# Altium PCB Jumper.PcbDoc (part 2 of 2)
Units mil, origin at the board's own origin, x right, y up, seen from the top; angles counter-clockwise.
Board outline 6325 x 3228 mil, 4 copper layers (Top Layer, GND, POWER, Bottom Layer), stack 61.145 mil thick; 115 components, 129 nets, 531 pads, 416 vias.
Unrouted connection lines stored in the file: 52.
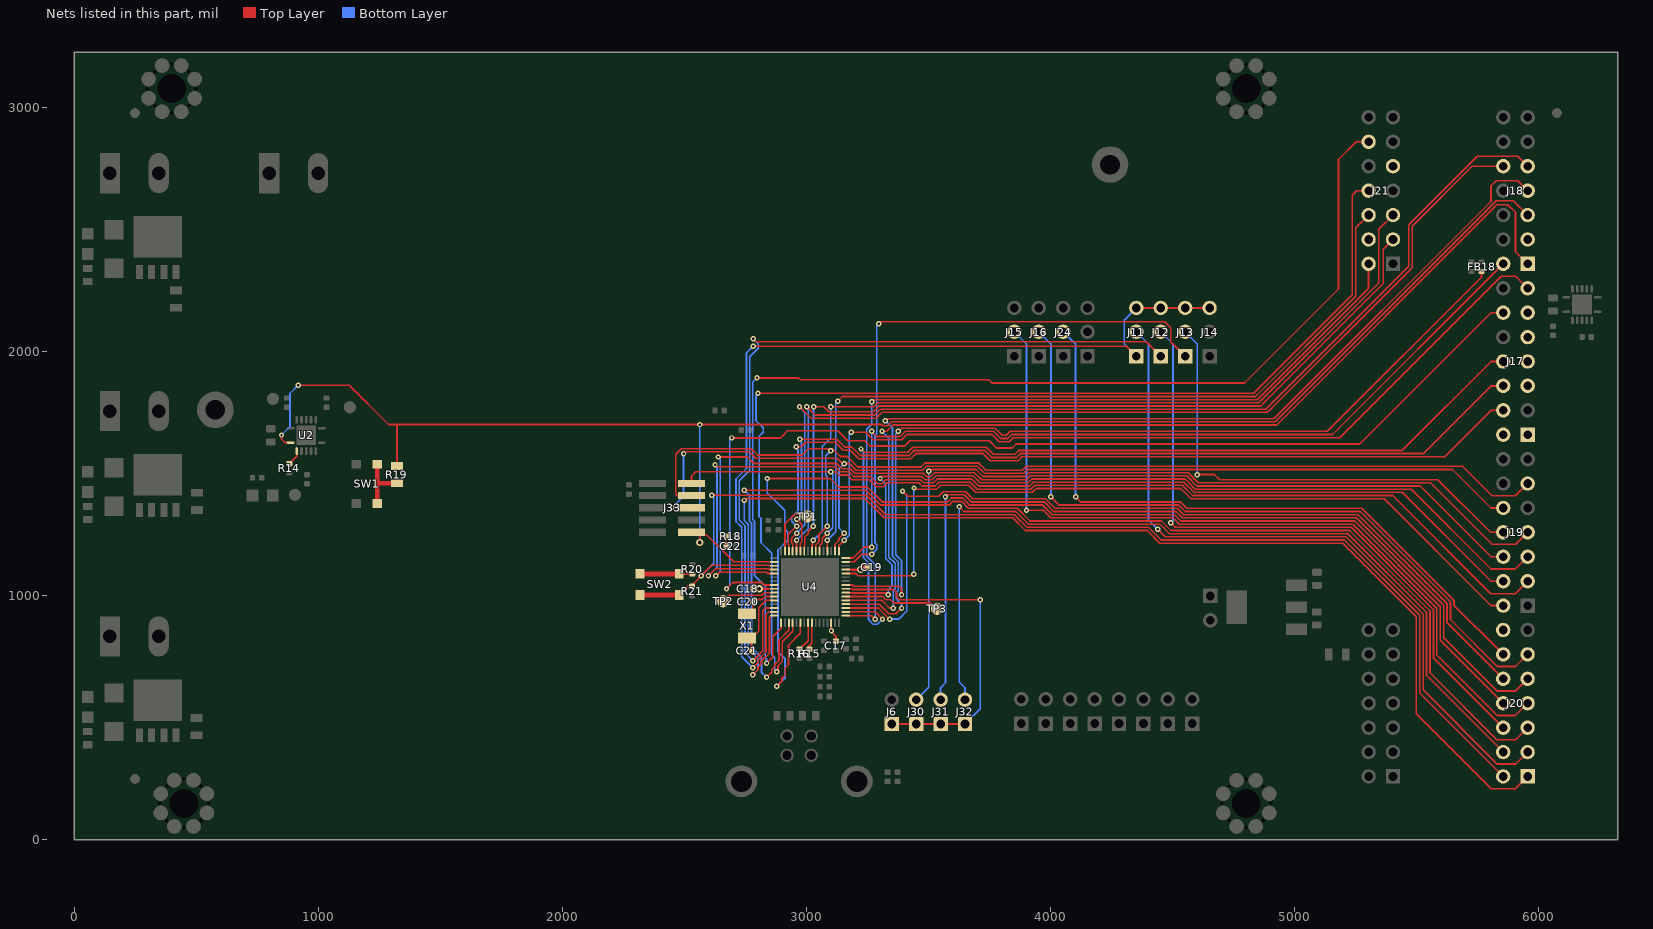
[diagram p4: the nets of this part, all layers, seen from the top]

## Via types
v1: diameter 22, hole 10, Top Layer to Bottom Layer, 356 vias
v2: diameter 30, hole 15, Top Layer to Bottom Layer, 42 vias
v3: diameter 20, hole 10, Top Layer to Bottom Layer, 16 vias
v4: diameter 22, hole 10, Top Layer to Bottom Layer, tented both sides, 2 vias

## Nets (pads, with @x,y where several pads share a name; then routed paths per layer and width w, separated by ;. In a path a pad name is that pad's centre, name@x,y a point inside that pad or via, vN(x,y) a via of type N, cw(c..) or ccw(c..) an arc to the next point about the centre after c; other vN are vias at no path point) (continued)
NetR14_1: R14.1 U2.2 | length 63.8
  Top Layer w7: R14.1@882,1541.9 911.83,1571.73 U2.2@911.83,1593.33
NetR15_2: R15.2 U4.25 | length 110.2
  Top Layer w6: R15.2@3004,788 3022.87,806.87 U4.25@3022.87,890.35
NetR16_2: R16.2 U4.24 | length 123.9
  Top Layer w6: R16.2@2972,781 3007.13,816.13 U4.24@3007.13,890.35
NetR19_1: R19.1 SW1.3 SW1.4 | length 242.8
  Top Layer w20: SW1.3@1242.31,1378.29 1242.31,1460 ; SW1.4@1242.31,1539.71 1242.31,1460 ; R19.1@1323,1461.57 1243.87,1461.57 1242.31,1460
NetR20_1: R20.1 SW2.1 SW2.2 | length 214.8
  Top Layer w7: SW2.2@2479.71,1090.31 2479.91,1090.1 R20.1@2533,1090.1
  Top Layer w20: SW2.1@2318.29,1090.31 SW2.2@2479.71,1090.31
NetTP1_1: TP1.1 U4.63 | length 223.8
  Top Layer w7: U4.63@2912.64,1183.65 2912.64,1295.64 2952,1335 2994,1335 TP1.1@3004,1325
NetTP2_1: TP2.1 U4.10 | length 224
  Top Layer w7: TP2.1@2659,978 2684,1003 2817,1003 2827.38,1013.38 U4.10@2868.35,1013.38
NetTP3_1: TP3.1 U4.38 | length 394.3
  Top Layer w7: U4.38@3161.65,997.63 3312.37,997.63 3326,984 3345,984 3358,971 3511,971 TP3.1@3535,947
nRESET: C22.2 J18.5 J33.10 R18.1 R19.2 U2.1 U4.2 | length 6946.1
  Top Layer w7: v1(850,1659) 850,1642 864,1628 U2.1@887,1628 ; v1(919,1863) 1127,1863 1288,1702 1323,1702 ; R19.2@1323,1532.43 1323,1702 ; J33.10@2538,1251 J33.10@2563.48,1251 ; v2(2563.48,1218.52) J33.10@2563.48,1251 ; J33.10@2563.48,1267.48 J33.10@2563.48,1251 ; R18.1@2672.1,1244 2672.1,1204.05 C22.2@2672.15,1204 2655.15,1187 2655,1187 ; U4.2@2868.35,1139.36 2702.64,1139.36 2655,1187 ; J18.5@5954.95,2560.28 5896.24,2619 5827,2619 4921,1713 3349,1713 3333,1697 3315,1697 3310,1702 v1(2563.48,1702) 1323,1702 ; J33.10@2563.48,1251 2591,1251 2655,1187
  Bottom Layer w7: v1(850,1659) 885,1694 885,1829 v1(919,1863) ; v2(2563.48,1218.52) v1(2563.48,1702)
PC5: J20.14
PD5: J21.5 U4.56 | length 3447.2
  Top Layer w7: U4.56@3022.87,1183.65 3022.87,1206.87 3025,1209 3025,1224 v1(3029,1228) ; v1(3100,1775) 3276,1775 3292,1791 4854,1791 ; 4872,1809 4854,1791 ; 5345,2323 5345,2282 ; J21.5@5403.38,2560.28 5345,2501.91 5345,2282 ; 4854,1791 5345,2282
  Bottom Layer w7: v1(3029,1228) 3065,1264 3065,1612 3100,1647 v1(3100,1775)
PF5: J17.6 U4.59 | length 3525.5
  Top Layer w7: v1(2961,1314) 2981,1294 2981,1220 2975.63,1214.63 U4.59@2975.63,1183.65 ; v1(2973,1642) 3125,1642 3157,1610 3186,1610 3221,1575 3421,1575 3442,1596 3731,1596 3760,1567 3861,1567 3877,1583 5528,1583 5805.28,1860.28 J17.6@5854.95,1860.28
  Bottom Layer w7: v1(2961,1314) 2980,1333 2980,1629 v1@2973,1636
PF6: J17.5
PF7: J21.6 U4.52 | length 3299
  Top Layer w7: U4.52@3085.87,1183.65 v1@3085.87,1228 ; v1(3129,1798) 3148,1817 4840,1817 ; 4849,1826 4840,1817 ; J21.6@5303.38,2560.28 5251,2507.91 5251,2228 4840,1817
  Bottom Layer w7: v1(3086,1228) 3121,1263 3121,1790 v1(3129,1798)
PG3: J18.3
PG4: J18.2 U4.48 | length 3556
  Top Layer w7: U4.48@3161.65,1155.11 3192.11,1155.11 3237,1200 v1(3268,1200) ; v1@3265,1675 3287,1653 3385,1653 3406,1674 3767,1674 3796,1645 3825,1645 3841,1661 5155.67,1661 ; 5184.67,1690 5155.67,1661 ; J18.2@5854.95,2360.28 5155.67,1661
  Bottom Layer w7: v1(3268,1200) v1(3268,1674)
PH2: J17.13 U4.49 | length 3612.9
  Top Layer w7: U4.49@3133.11,1183.65 3133.11,1206.11 v1(3155,1228) ; v1(3184,1670) 3243,1670 3273,1640 3391,1640 3412,1661 3761,1661 3790,1632 3831,1632 3847,1648 5185,1648 5847,2310 5905.24,2310 J17.13@5954.95,2260.28
  Bottom Layer w7: v1(3155,1228) 3176,1249 3176,1662 v1(3184,1670)
PH6: J18.1 U4.37 | length 4180.9
  Top Layer w7: U4.37@3161.65,981.88 3309.12,981.88 3320,971 3341,950 v1(3356,950) ; v1(3310,1674) 3329,1674 3355,1700 4927,1700 5829,2602 5874,2602 5905,2571 5905,2410.24 J18.1@5954.95,2360.28
  Bottom Layer w7: v1(3310,1674) 3338,1646 3338,1159 3364,1133 3364,1028 3356,1020 v1(3356,950)
PH7: J21.3 U4.58 | length 3390.4
  Top Layer w7: U4.58@2991.38,1183.65 2991.38,1208.38 2994,1211 2994,1241 3008,1255 3008,1265 v1(3029,1286) ; v1(3030,1775) 3071,1775 3092,1754 3274,1754 3298,1778 4861,1778 ; 4880,1797 4861,1778 ; J21.3@5403.38,2460.28 5363,2419.91 5363,2280 4861,1778
  Bottom Layer w7: v1(3029,1286) v1@3029,1775
PJ2: J19.5 U4.39 | length 3540.9
  Top Layer w7: U4.39@3161.65,1013.38 3182.79,1013.38 3184.17,1012 3328,1012 v1(3335,1005) ; v1@3301,1482 3308,1489 3473,1489 3486,1476 3515,1476 3531,1492 3683,1492 3712,1463 3908,1463 3924,1479 4552,1479 4594,1437 5478,1437 5805,1110 5904.67,1110 J19.5@5954.95,1160.28
  Bottom Layer w7: v1(3302,1481) 3325,1458 3325,1153 3351,1127 3351,1041 3335,1025 v1(3335,1005)
PJ5: J19.3 J33.2 U4.54 | length 4079.6
  Top Layer w7: J33.2@2529.92,1461 2529.92,1490.92 2547,1508 v1(3100,1508) 3121,1508 3134,1495 3168,1495 3187,1476 3258,1476 3287,1447 3316,1447 3332,1463 3461,1463 3474,1450 3527,1450 3543,1466 3671,1466 3700,1437 3920,1437 3936,1453 4540,1453 4582,1411 5402,1411 5804,1009 5903.67,1009 J19.3@5954.95,1060.28 ; U4.54@3054.37,1183.65 3054.37,1205.37 3065,1216 3065,1236 v1(3086,1257)
  Bottom Layer w7: v1(3086,1257) 3108,1279 3108,1500 v1(3100,1508)
PK0: J17.4 U4.62 | length 3495.7
  Top Layer w7: U4.62@2928.39,1183.65 2928.39,1209.61 2926,1212 2926,1252 v1(2960,1286) ; v1(2959,1611) 2979,1611 2997,1629 3119,1629 3151,1597 3180,1597 3215,1562 3427,1562 3448,1583 3725,1583 3754,1554 3867,1554 3883,1570 5615,1570 5805.28,1760.28 J17.4@5854.95,1760.28
  Bottom Layer w7: v1@2959,1605 2966,1598 2966,1349 2940,1323 2940,1306 v1(2960,1286)
PWR_MON: J21.4
RX2: J17.12 U4.8 | length 4286.2
  Top Layer w7: v1(2673,1029) 2699,1055 2818,1055 2828.13,1044.87 U4.8@2868.35,1044.87 ; v1(2694,1647) 2894,1647 2905,1658 2923,1676 3129,1676 3169,1636 3239,1636 3261,1614 3403,1614 3424,1635 3749,1635 3778,1606 3843,1606 3859,1622 5267,1622 5804.95,2159.95 5854.95,2159.95 J17.12@5854.95,2160.28
  Bottom Layer w7: v1(2673,1029) 2686,1042 2686,1639 v1(2694,1647)
RX3: J19.4 U4.4 | length 4221.6
  Top Layer w7: v1(2599,1082) 2628,1111 2844.17,1111 2847.31,1107.87 U4.4@2868.35,1107.87 ; v1(2626,1537) 2634,1529 3119,1529 3140,1508 3174,1508 3193,1489 3264,1489 3293,1460 3310,1460 3326,1476 3467,1476 3480,1463 3521,1463 3537,1479 3677,1479 3706,1450 3914,1450 3930,1466 4546,1466 4588,1424 5441,1424 5804.72,1060.28 J19.4@5854.95,1060.28
  Bottom Layer w7: v1(2599,1082) 2634,1117 2634,1529 v1(2626,1537)
SCK: FB18.2 U4.41 | length 3663.4
  Top Layer w7: U4.41@3161.65,1044.87 3189.67,1044.87 3194.54,1040 3381,1040 3390,1031 v1(3390,1005) ; v1(3377,1674) 3390,1687 3773,1687 3802,1658 3819,1658 3835,1674 ; 3857,1674 3835,1674 ; FB18.2@5766,2329 5766,2306 5134,1674 3835,1674
  Bottom Layer w7: v1(3377,1674) 3366,1663 3366,1169 3377,1158 3390,1145 v1(3390,1005)
SCL: J19.11 J33.4 U4.55 | length 4321.9
  Top Layer w7: J33.4@2529.92,1411 2470,1411 2465,1416 2465,1580 2488,1603 2774,1603 2800,1577 2983,1577 3009,1603 3107,1603 3139,1571 3168,1571 3211,1528 3470,1528 3486,1544 3707,1544 3736,1515 3884.38,1515 3900.38,1531 5688,1531 5809,1410 5904.67,1410 J19.11@5954.95,1460.28 ; U4.55@3038.62,1183.65 3038.62,1208.62 3052,1222 3052,1252 v1(3086,1286)
  Bottom Layer w7: v1(3086,1286) 3086,1487 3079,1494 3079,1574 v1(3100,1595)
SD_SS: J19.2 U4.44 | length 3278.8
  Top Layer w7: U4.44@3161.65,1092.12 3201.82,1092.12 3211.94,1082 3433,1082 v1(3440,1089) ; v1(3441,1442) 3446,1437 3533,1437 3549,1453 3665,1453 3694,1424 3926,1424 3942,1440 4534,1440 4576,1398 5367,1398 5804.72,960.28 J19.2@5854.95,960.28
  Bottom Layer w7: v1(3440,1089) 3440,1441 v1(3441,1442)
SDA: J19.10 J33.6 U4.50 | length 4192.6
  Top Layer w7: v1(2451,1362) 2528.92,1362 J33.6@2529.92,1361 ; v1(2497,1582) 2505,1590 2767,1590 2793,1564 3127,1564 3149,1542 v1(3155,1542) 3178,1542 3205,1515 3476,1515 3492,1531 3701,1531 3730,1502 3890,1502 3906,1518 5647,1518 5804.72,1360.28 J19.10@5854.95,1360.28 ; U4.50@3117.36,1183.65 3117.36,1211.36 3134,1228 3134,1236 v1(3155,1257)
  Bottom Layer w7: v1(2451,1362) 2497,1408 v1(2497,1582) ; v1(3155,1257) 3134,1278 3134,1521 v1(3155,1542)
TACH_0: J17.9
TACH_1: J17.11
THERM0: J21.2 U4.33 | length 3409.6
  Top Layer w7: U4.33@3161.65,918.89 3268.11,918.89 v1(3282,905) ; v1(3268,1796) 3276,1804 4847,1804 ; 4863,1820 4847,1804 ; J21.2@5303.38,2360.28 5303.38,2260.38 4847,1804
  Bottom Layer w7: 3247,1181 3247,1162 ; v1(3268,1796) 3268,1703 3247,1682 3247,1162 ; v1@3282.11,905 3282.11,1126.89 3247,1162
THERM1: J17.8 U4.34 | length 3763.6
  Top Layer w7: U4.34@3161.65,934.64 3282.36,934.64 v1(3312,905) ; v1(3224,1602) 3238,1588 3415,1588 3436,1609 3737,1609 3766,1580 3855,1580 3871,1596 5441,1596 5805.28,1960.28 J17.8@5854.95,1960.28
  Bottom Layer w7: v1(3224,1602) 3234,1592 3234,1156 3255,1135 3255,902 3273,884 3291,884 v1(3312,905)
THERM2: J17.7
TMC_DIAG: J6.1 J30.1 J31.1 J32.1 U4.40 | length 1413.7
  Top Layer w7: U4.40@3161.65,1029.13 3185.72,1029.13 3188.85,1026 3357,1026 3369,1014 3369,997 3382,984 v1(3712,984) ; J6.1@3350,475 J30.1@3450,475 J31.1@3550,475 J32.1@3650,475
  Bottom Layer w7: J32.1@3650,475 3712,537 v1(3712,984)
TX2: J21.12 U4.17 | length 4645.7
  Top Layer w7: v1(2798,1893) 2968,1893 2976,1885 3748,1885 3761,1872 3782,1872 4795,1872 5180,2257 5180,2788 5252.28,2860.28 J21.12@5303.38,2860.28 ; v1(2837,724) 2862,749 ; 2862,769 2862,749 ; U4.17@2896.89,890.35 2896.89,867.89 2862,833 2862,749
  Bottom Layer w7: v1(2798,1893) 2781,1876 2781,1509 2780,1508 2780,1313 2788,1305 2788,1083 2832,1039 2832,747 2837,742 v1(2837,724)
TX3: J19.6 U4.5 | length 4174.6
  Top Layer w7: v1(2629,1082.37) 2643.63,1097 2836,1097 2840.88,1092.12 U4.5@2868.35,1092.12 ; v1(2639,1569) 2759,1569 2786,1542 ; 2804,1542 2786,1542 ; J19.6@5854.95,1160.28 5804.72,1160.28 5515,1450 4600,1450 4558,1492 3918,1492 3902,1476 3718,1476 3689,1505 3525,1505 3509,1489 3492,1489 3479,1502 3199,1502 3180,1521 3146,1521 3125,1542 2786,1542
  Bottom Layer w7: v1(2629,1082.37) 2647,1100.37 2647,1561 v1(2639,1569)
VddC: C17.2 C18.1 C19.1 U4.9 U4.30 U4.45 | length 263.7
  Top Layer w7.87: 2843,1029.13 U4.9@2868.35,1029.13 ; U4.30@3101.61,890.35 3101.61,854.45 3121,835.06 C17.2@3121,814.7 ; U4.45@3161.65,1107.87 3187,1107.87
  Top Layer w10: v2@2799.7,1029.13 v2(2807,1029.13) 2843,1029.13 ; 3187,1107.87 v2@3222,1107.87
  Top Layer w20: C18.1@2779.7,1029 2779.83,1029.13 v2@2799.7,1029.13 ; v2(3222,1108) 3231,1117 C19.1@3249.3,1117
  other v4: 3102.97,857.6
X-CS_DRV: J11.1 J11.3 J12.3 J13.3 J14.3 U4.15 | length 3778.7
  Top Layer w7: v1(2780.7,706) 2803,728.3 2803,738 2835,770 2835,924 2845.64,934.64 U4.15@2868.35,934.64 ; v1(2782,2023) 4311,2023 J11.1@4352,1982 ; J11.3@4352,2179.64 J12.3@4452,2179.64 J13.3@4552,2179.64 J14.3@4652,2179.64
  Bottom Layer w7: v1(2780.7,706) 2736,750.7 2736,1281 2712,1305 2712,1479 2755,1522 2755,1996 v1(2782,2023) ; J11.1@4352,1982 4302,2032 4302,2129.64 J11.3@4352,2179.64
X-DIR: J20.1 U4.16 | length 4989.9
  Top Layer w7: v1(2746,1391) 2754,1399 3240,1399 3319,1320 3846,1320 3898,1268 4396,1268 4448,1216 5197,1216 5499,914 5499,517 5806,210 5904.47,210 J20.1@5954.76,260.28 ; v1(2780.7,677) 2802,698.3 2802,708 2816,722 2816,732.1 2849,765.1 2849,912.78 2855.11,918.89 U4.16@2868.35,918.89
  Bottom Layer w7: v1(2746,1391) 2746,1309 2762,1293 2762,783 2802,743 2802,698.3 v1(2780.7,677)
X-EN: J15.2 J20.7 | length 3286.1
  Top Layer w7: v1(3902,1351) 3970,1351 4001,1320 4502,1320 4528,1294 5239,1294 5583,950 5583,758 5831,510 5904.47,510 J20.7@5954.76,560.28
  Bottom Layer w7: J15.2@3852,2082 3902,2032 v1(3902,1351)
X-STEP: J20.2 R21.1 SW2.3 SW2.4 U4.3 | length 4864.8
  Top Layer w7: SW2.4@2479.71,1003.69 2514.91,1038.9 R21.1@2532,1038.9 2540,1046.9 2540,1052 v1(2570,1082) 2613,1125 2849,1125 2850.39,1123.61 U4.3@2868.35,1123.61 ; v1(2612,1412) 3246,1412 3325,1333 3852,1333 3904,1281 4402,1281 4454,1229 5204,1229 5513,920 5513,602.04 J20.2@5854.76,260.28
  Top Layer w20: SW2.3@2318.29,1003.69 SW2.4@2479.71,1003.69
  Bottom Layer w7: v1(2570,1082) 2621,1133 2621,1403 v1(2612,1412)
X_DIAG: J20.4 J32.2 | length 3596.3
  Top Layer w7: v1@3626.5,1365.5 3646,1346 3858,1346 3910,1294 4449,1294 4488,1255 5218,1255 5541,932 5541,674.04 J20.4@5854.76,360.28
  Bottom Layer w7: v1(3627,1366) 3627,647 3650,624 J32.2@3650,575
X_MIN: J18.10 U4.61 | length 4081.8
  Top Layer w7: U4.61@2944.13,1183.65 2944.13,1213.87 2939,1219 2939,1236 v1(2960,1257) ; v1(2972,1775) 3019,1728 3286,1728 3310,1752 4889,1752 ; 4908,1771 4889,1752 ; J18.10@5854.95,2760.28 5727.28,2760.28 5482,2515 5482,2345 4889,1752
  Bottom Layer w7: v1(2960,1257) 2994,1291 2994,1753 v1(2972,1775)
X_nCS: J11.2 J20.3 | length 2979.3
  Top Layer w7: v1(4440,1273) 4471,1242 ; 4489,1242 4471,1242 ; J20.3@5954.76,360.28 5905.47,311 5831,311 5527,615 5527,926 5211,1242 4471,1242
  Bottom Layer w7: J11.2@4352,2082 4402,2032 4402,1311 v1(4440,1273)
Xin: C20.2 U4.11 X1.1 | length 162.9
  Top Layer w7: X1.1@2780,911 C20.2@2780,977 2788,985 2819,985 2831.63,997.63 U4.11@2868.35,997.63
Xout: C21.2 U4.12 X1.2 | length 280.8
  Top Layer w7: X1.2@2757,827.79 2776.79,827.79 2805,856 2805,951 2835.88,981.88 U4.12@2868.35,981.88
  Top Layer w7.87: C21.2@2776,776 X1.2@2776,826
XY-REF-PWM: J17.2
Y-CS_DRV: J12.1 U4.14 | length 3354.2
  Top Layer w7: v1(2780.7,735) 2821,775.3 2821,939 2832.39,950.39 U4.14@2868.35,950.39 ; v1(2782,2053) 2794,2041 4393,2041 J12.1@4452,1982
  Bottom Layer w7: v1(2780.7,735) 2749,766.7 2749,1287 2725,1311 2725,1472 2768,1515 2768,1979 2803,2014 2803,2032 v1(2782,2053)
Y-DIR: J20.5 U4.19 | length 4880
  Top Layer w7: v1(2746,1433) 3244,1433 3305,1372 3585,1372 3600,1387 3636,1387 3664,1359 3864,1359 3916,1307 4455,1307 4494,1268 5225,1268 5555,938 5555,685 5829,411 5905.47,411 J20.5@5954.76,460.28 ; v1(2837,666) 2858,687 2858,697 2871,710 2871,720 2888,737 2888,819 2928.39,859.39 U4.19@2928.39,890.35
  Bottom Layer w7: v1(2746,1433) 2767,1412 2767,1307 2775,1299 2775,789 2816,748 2816,687 v1(2837,666)
Y-EN: J16.2 J20.11 | length 3019.5
  Top Layer w7: v1(4002,1406) 4036,1372 ; 4055,1372 4036,1372 ; J20.11@5954.76,760.28 5905.47,711 5831,711 5639,903 5639,976.04 5269.04,1346 4552,1346 4526,1372 4036,1372
  Bottom Layer w7: J16.2@3952,2082 4002,2032 v1(4002,1406)
Y-STEP: J20.8 U4.22 | length 4757
  Top Layer w7: v1(2840,1481) 3097,1481 3132,1446 ; v1(2879,630) 2900,651 2900,662 2914,676 2914,706 2927,719 2927,798 2975.63,846.63 U4.22@2975.63,890.35 ; 3170,1446 3132,1446 ; J20.8@5854.76,560.28 5597,818.04 5597,956 5246,1307 4534,1307 4508,1333 4007,1333 3968,1372 3670,1372 3641,1401 3595,1401 3579,1385 3311,1385 3250,1446 3132,1446
  Bottom Layer w7: v1(2840,1481) 2840,1421.73 2911,1350.73 2911,1273 2924,1260 2924,1228 2884,1188 2884,771 2913,742 2913,664 v1(2879,630)
Y_DIAG: J20.9 J31.2 | length 3659.1
  Top Layer w7: v1(3570,1406) 3578,1414 3647,1414 3676,1385 3974,1385 4013,1346 4514,1346 4540,1320 5253,1320 5611,962 5611,829 5830,610 5904.47,610 J20.9@5954.76,660.28
  Bottom Layer w7: J31.2@3550,575 3550,624 3570,644 v1(3570,1406)
Y_MIN: J18.9 U4.60 | length 4167.4
  Top Layer w7: U4.60@2959.88,1183.65 v1(2959.88,1227.88) ; v1(3001,1775) 3035,1741 3280,1741 3304,1765 4882,1765 ; 4903,1786 4882,1765 ; J18.9@5954.95,2760.28 5914.24,2801 5748,2801 5468,2521 5468,2351 4882,1765
  Bottom Layer w7: v1(2959.88,1227.88) 3008,1276 3008,1768 v1(3001,1775)
Y_nCS: J12.2 J20.6 | length 2632.6
  Top Layer w7: v1(4493,1299) 4511,1281 5232,1281 5569,944 5569,746.04 J20.6@5854.76,460.28
  Bottom Layer w7: J12.2@4452,2082 4502,2032 4502,1308 v1(4493,1299)
Z-CS_DRV: J13.1 U4.47 | length 2432.8
  Top Layer w7: U4.47@3161.65,1139.36 3196.36,1139.36 3227,1170 v1(3268,1170) ; v1(3297,2115) 3305,2123 4468,2123 4493,2098 4493,2041 J13.1@4552,1982
  Bottom Layer w7: v1(3268,1170) 3289,1191 3289,1209 3281,1217 3281,1656 3289,1664 3289,2107 v1(3297,2115)
Z-DIR: J21.8 U4.20 | length 4506.2
  Top Layer w7: v1(2802,1830) 4833,1830 5237,2234 5237,2642 5255.28,2660.28 J21.8@5303.38,2660.28 ; v1(2879,689) 2884,694 2884,714 2901,731 2901,812 2944.13,855.13 U4.20@2944.13,890.35
  Bottom Layer w7: v1(2802,1830) 2794,1822 2794,1718 2823,1689 2823,1671 2807,1655 2807,1497 2806,1496 2806,1325 2814,1317 2814,1219 2858,1175 2858,759 2871,746 2871,697 v1(2879,689)
Z-EN: J20.12 J24.2 | length 2728.6
  Top Layer w7: v1(4103,1406) 4103,1405 4123,1385 4532,1385 4558,1359 5276,1359 5653,982 5653,962.04 J20.12@5854.76,760.28
  Bottom Layer w7: J24.2@4052,2082 4103,2031 v1(4103,1406)
Z-REF-PWM: J17.1
Z-STEP: J20.10 U4.35 | length 3635.4
  Top Layer w7: U4.35@3161.65,950.39 3295.61,950.39 v1(3341,905) ; v1(3394,1429) 3415,1408 3542,1408 3561,1427 3653,1427 3682,1398 ; 3697,1398 3682,1398 ; J20.10@5854.76,660.28 5625,890.04 5625,968 5260,1333 4546,1333 4520,1359 4019,1359 3980,1398 3682,1398
  Bottom Layer w7: v1(3341,905) 3378,905 3411,938 3411,1412 v1(3394,1429)
Z_DIAG: J19.7 J30.2 | length 3574.2
  Top Layer w7: v1(3501,1510) 3509,1518 3695,1518 3724,1489 3896,1489 3912,1505 4564,1505 4606,1463 5557,1463 5809,1211 5905.67,1211 J19.7@5954.95,1260.28
  Bottom Layer w7: J30.2@3450,575 3501,626 v1(3501,1510)
Z_MIN: J18.7 U4.36 | length 4150.8
  Top Layer w7: U4.36@3161.65,966.13 3298.87,966.13 3338,927 3367,927 v1(3390,950) ; v1@3323.5,1718.5 3324,1718.5 3331.5,1726 4915,1726 5805,2616 5805,2680 5826,2701 5914.24,2701 J18.7@5945.76,2669.48
  Bottom Layer w7: v1(3324,1718) 3353,1689 3353,1163 3377,1139 3377,1022 3369,1014 3369,987 ; 3369,1002 3369,987 ; v1(3390,950) 3390,966 3369,987
Z_nCS: J13.2 J19.8 | length 1956.7
  Top Layer w7: v1(4602,1497) 4672,1497 4693,1476 5587,1476 5802.72,1260.28 J19.8@5854.95,1260.28
  Bottom Layer w7: J13.2@4552,2082 4602,2032 v1(4602,1497)
Z_THERM: J21.9
pads on no net: D2. D4. D6. FD1.F FD2.F FD3.F H1. H2. H3. H4. Q1. Q2. Q3.

## Polygon pours and split planes (outlines as drawn)
GND on Top Layer "TOP GND" (solid, pour order 19): 6,6 6319,6 6319,3222 6,3222
NetC9_2 on Top Layer "3V3 REG Top Heatsink Pour" (solid, pour order 15): 4720,817 4951,817 4951,1089 4720,1089
12V on Top Layer "FAN-2 12V" (solid, pour order 8): 37,2274 204,2274 204,2381 124,2381 124,2302 38,2302 38,2301
12V on Top Layer "FAN-3 12V" (solid, pour order 6): 37,1299 204,1299 204,1406 124,1406 124,1327 38,1327 38,1326
12V on Top Layer "FET-0 12V" (solid, pour order 4): 37,376 204,376 204,483 124,483 124,404 38,404 38,403
NetC9_2 on Bottom Layer "3V3 REG Top Heatsink Pour" (solid, pour order 17): 4720,733 5241,733 5241,1862 4720,1862
GND on Bottom Layer "BOTTOM GND" (solid, pour order 21): 6,6 6319,6 6319,3222 6,3222
MNTA on Bottom Layer "U1 MNTA BOT HS PAD" (solid, pour order 0): 6078,2283 6078,2108 6268,2108 6268,2283
MNTB on Bottom Layer "U2 MNTB BOT HS PAD" (solid, pour order 2): 824,1565 1011.31,1565 1011.31,1729 824,1729
NetD5_C on Bottom Layer "FET-0 HS" (solid, pour order 10): 217,393 577,393 577,1278 217,1278
NetD3_C on Bottom Layer "FAN-3 HS" (solid, pour order 11): 217,1316 577,1316 577,2201 217,2201
NetD1_C on Bottom Layer "FAN-2 HS" (solid, pour order 13): 217,2291 577,2291 577,2924 217,2924
GND on GND (split plane): 6304.9,20.1 20.1,20.1 20.1,3207.9 6304.9,3207.9
3V3 on POWER (split plane): 6284.91,40.09 40.09,40.09 40.09,3187.91 6284.91,3187.91
NetC16_2 on POWER (split plane): 2805.65,288.65 2807.22,287.45 2809.04,286.69 2811,286.44 3131,286.44 3132.96,286.69 3134.03,287.14 3134.78,287.45 3136.35,288.65 3172.13,324.44 3290.44,324.44 3290.44,155.56 2650.22,155.56 2650.22,324.99 2769.32,324.99
VddC on POWER (split plane): 3243.91,1117.82 3243.91,887.18 3191.82,835.09 3104.18,835.09 3074.13,865.13 3072.04,866.73 3069.61,867.74 3067,868.09 2784.09,868.09 2784.09,1040.82 2796.18,1052.91 2818.82,1052.91 2831.91,1039.82 2831.91,1029 2831.91,929 2832.26,926.39 2833.27,923.96 2834.87,921.87 2835.14,921.6 2837.22,920 2838.94,919.28 2839.66,918.99 2842.27,918.65 3079.09,918.65 3117.87,879.87 3119.96,878.27 3122.39,877.26 3125,876.91 3160,876.91 3162.61,877.26 3165.04,878.27 3167.13,879.87 3196.13,908.87 3197.73,910.96 3198.74,913.39 3199.09,916 3199.09,1117.82 3212.18,1130.91 3230.82,1130.91

## Other copper
Top Layer:
  pour cut-out: 4955,909 4955,816.94 5063,816.94 5063,910 5043,910
  pour cut-out: 1032,1739.41 1032,1576 869,1576 869,1739.41
  pour cut-out: 6268,2283 6268,2109 6079,2109 6079,2283
  pour cut-out: 2602,1223 2297,1223 2297,1494.24 2603.27,1494.24 2603.27,1491
POWER (plane layer: these items are gaps in the copper):
  lines w15: 2642.65,148 2642.65,332.55 2772.45,332.55 2811,294 3131,294 3169,332 3298,332 3298,148 2642.65,148
  lines w20: 2774,858 3067,858 3100,825 3196,825 3254,883 3254,1122 3235,1141 3208,1141 3189,1122 3189,916 3160,887 3125,887 3083.27,928.73 2842.27,928.73 2842,929 2842,1029 2842,1044 2823,1063 2792,1063 2774,1045 2774,858

## Silkscreen, mask and mechanical layers (free items; w line width, h text height)
Top Overlay:
  lines w5: 3310,666 3310,711 3434,711 ; 3565,711 3691,711 3691,667
  lines w6: 3767,2107 3767,2248 3786,2267 3821,2267 ; 3805,2251 3821,2267 ; 3805,2283 3821,2267 ; 4714,1861 4698,1877 ; 4714,1893 4698,1877 ; 4836,1943 4836,1904 4809,1877 4698,1877 ; 5801,2398 5819,2380 ; 5805,910 6005,910 ; 5805,1610 6005,1610 ; 5805,2310 6005,2310 ; 5982,1922 6026,1872 ; 5983,2023 6037,1923 ; 5990,2132 6018,2013 6061,1953 ; 5991,1837 6016,1837 ; 5996,2953 6023,2924 ; 5999,2263 6026,2352 ; 5999,2378 6010,2417
  lines w15: 692,1344 692,1451 868,1451 868,1380 1118,1380 1118,1573 1376,1573 1376,1344 692,1344 ; 1912,967 2508,967 2508,1127 1912,1127 1912,967
  text "FAN-2" at 24,3029 h50
  text "13" at 5384,3025 h30
  text "13" at 5935.57,3025 h30
  text "14" at 5281,3023 h30
  text "14" at 5832.57,3023 h30
  text "GND" at 5470,2949 h30
  text "GND" at 5161,2948 h30
  text "GND" at 5705,2944 h30
  text "HV IN" at 896,2931 h50
  text "+" at 125,2921 h70
  text "GND" at 6027,2893 h30
  text "GND" at 4153,2870 h70
  text "ACTIVE" at 5450,2863 h30 r15
  text "TX2" at 5160,2847 h30
  text "GND" at 5703,2843 h30
  text "GND" at 6025,2839 h30
  text "EINSY TO G55" at 1892,2832 h75
  text "Z_THERM" at 5451,2763 h30 r15
  text "HEAT-0_5V" at 4980,2746 h30
  text "Y_MIN" at 6021,2741 h30
  text "BRIDGE BOARD r1.0a" at 1892,2725 h75
  text "X_MIN" at 5685,2697 h30 r15
  text "MISO" at 5449,2665 h30 r15
  text "Z-DIR" at 5105,2649 h30
  text "Z_MIN" at 6023,2645 h30
  text "nAC_FAULT" at 5569,2577 h30 r15
  text "PD5" at 5469,2546 h30
  text "MOSI" at 5693,2545 h30
  text "nRESET" at 6028,2545 h30
  text "PF7" at 5157,2544 h30
  text "+" at 777,2462 h70
  text "-" at 977,2462 h70
  text "PH7" at 5467,2444 h30
  text "SCK" at 5714,2444 h30
  text "PWR_MON" at 5037,2443 h30
  text "PG3" at 6017,2439 h30
  text "PH6" at 6017,2401 h30
  text "PG4" at 5716,2397 h30
  text "PH2" at 6022,2359 h30
  text "THERM0" at 5067,2348 h30
  text "FAN-0_5V" at 5465,2347 h30
  text "2" at 5293,2264 h30
  text "1" at 5401,2262 h30
  text "Z" at 4042,2254 h30
  text "X" at 3840,2253 h30
  text "E0" at 4129,2253 h30
  text "Y" at 3942,2252 h30
  text "EN_DRV" at 3572,2167 h30
  text "FAN-1_5V" at 5598,2166 h30 r15
  text "X-CS_DRV" at 4718,2164 h30
  text "RX2" at 5710,2142 h30
  text "__CS" at 4720,2067 h30
  text "__EN" at 3669,2065 h30
  text "BED-HEAT_5V" at 5472,2045 h30
  text "-NC-" at 3667,1965 h30
  text "__-CS_DRV" at 4738,1963 h30
  text "FAN-3" at 218,1952 h50
  text "TACH_1" at 6064,1948 h30
  text "THERM1" at 5628,1946 h30
  text "+" at 123,1943 h70
  text "TACH_0" at 6042,1906 h30
  text "THERM2" at 6031,1863 h30
  text "PF5" at 5711,1846 h30
  text "PF6" at 6023,1822 h30
  text "BED_MON" at 6021,1742 h30
  text "PK0" at 5709,1741 h30
  text "Y-CS_DRV" at 4470,1685 h30 r90
  text "Z-CS_DRV" at 4572,1685 h30 r90
  text "X-CS_DRV" at 4370,1683 h30 r90
  text "Z-REF-PWM" at 6026,1658 h30
  text "E0-CS_DRV" at 4668,1655 h30 r90
  text "XY-REF-PWM" at 5501,1644 h30
  text "GND" at 487,1598 h70
  text "E0-DIR" at 6021,1545 h30
  text "E-REF-PWM" at 5530,1544 h30
  text "SCL" at 6019,1448 h30
  text "E0_DIAG" at 5599,1447 h30
  text "SDA" at 5705,1346 h30
  text "E0_nCS" at 6020,1343 h30
  text "Z_nCS" at 5648,1249 h30
  text "nRESET" at 981,1246 h70
  text "Z_DIAG" at 6021,1244 h30
  text "TX3" at 5710,1145 h30
  text "PJ2" at 6022,1144 h30
  text "RX3" at 5711,1044 h30
  text "PJ5" at 6022,1041 h30
  text "FET-0" at 225,1028 h50
  text "+" at 124,1024 h70
  text "Erase" at 1950,1014 h70
  text "E0-STEP" at 6028,957 h30
  text "SD_SS" at 5649,946 h30
  text "13" at 5384,925 h30
  text "14" at 5281,923 h30
  text "I_3V3" at 4571,887 h30 r90
  text "5V0" at 5470,847 h30
  text "E0-EN" at 6024,847 h30
  text "5V0" at 5154,845 h30
  text "PC5" at 5708,843 h30
  text "Y-EN" at 6021,747 h30
  text "1V8_ANA" at 4876.25,746 h30
  text "3V3" at 5472,745 h30
  text "Z-EN" at 5675,744 h30
  text "DIAG" at 3447,696 h30
  text "MISO_E" at 5449,660 h30 r15
  text "MISO_Y" at 4194,656 h30 r90
  text "MISO_Z" at 4394,656 h30 r90
  text "MOSI_Y" at 4091,655 h30 r90
  text "MOSI_Z" at 4297,655 h30 r90
  text "MOSI_X" at 3895,653 h30 r90
  text "MISO_X" at 3996,653 h30 r90
  text "MISO_E" at 4590,652 h30 r90
  text "MOSI_E" at 4495,651 h30 r90
  text "MOSI_E" at 5073,646 h30
  text "Y-DIAG" at 6020,645 h30
  text "E0" at 3366,643 h30 r90
  text "Z" at 3468,643 h30 r90
  text "Y" at 3564,642 h30 r90
  text "X" at 3665,642 h30 r90
  text "Z-STEP" at 5654,577 h30 r15
  text "MISO_Z" at 5448,568 h30 r15
  text "MOSI_Z" at 5073,546 h30
  text "X-EN" at 6020,545 h30
  text "Y-STEP" at 5656,478 h30 r15
  text "MISO_Y" at 5447,470 h30 r15
  text "MOSI_Y" at 5072,445 h30
  text "Y-DIR" at 6042,443 h30
  text "Y_nCS" at 5684,388 h30 r15
  text "MISO_X" at 5449,371 h30 r15
  text "MOSI_X" at 5073,346 h30
  text "X_nCS" at 6032,344 h30
  text "X-DIAG" at 5661,278 h30 r15
  text "X-DIR" at 6044,255 h30
  text "GND" at 5485,246 h30
  text "GND" at 5153,244 h30
  text "X-STEP" at 5655,172 h30 r15
  text "2" at 5293,164 h30
  text "2" at 5844.38,164 h30
  text "1" at 5401,162 h30
  text "1" at 5952.38,162 h30
Outline:
  the board outline again, w2
Mechanical 26:
  lines w3: 2271.7,1297 2271.7,1665.7 ; 2299,1700.3 2667.7,1700.3 ; 2306.3,1269.7 2675,1269.7 ; 2702.3,1304.3 2702.3,1673
Scratch:
  lines w2: 472,2912 3575,2912 ; 848.09,1753.91 1053.02,1753.91 ; 849.38,1561.15 1054.31,1561.15 ; 2709,1228 3155,1228 ; 4952,-32 4952,255
  lines w5: 472,313 472,2582 ; 2510.14,1291.22 2549.46,1330.54 ; 2510.36,1330.9 2550.02,1291.23 ; 5263.43,2420 5342.43,2499 ; 5264.71,2499.05 5343.71,2420.05 ; 5363.05,2720.28 5442.05,2799.28 ; 5363.05,2820.28 5442.05,2899.28 ; 5364.33,2799.33 5443.33,2720.33 ; 5364.33,2899.33 5443.33,2820.33 ; 5814.62,2620.28 5893.62,2699.28 ; 5814.8,820 5893.8,899 ; 5814.95,1520.28 5893.95,1599.28 ; 5815,1620 5894,1699 ; 5815.91,2699.33 5894.91,2620.33 ; 5816.09,899.05 5895.09,820.05 ; 5816.24,1599.33 5895.24,1520.33 ; 5816.28,1699.05 5895.28,1620.05 ; 5914.62,1920.28 5993.62,1999.28 ; 5914.62,2020.28 5993.62,2099.28 ; 5914.62,2120.28 5993.62,2199.28 ; 5914.62,2420.28 5993.62,2499.28 ; 5915,1620 5994,1699 ; 5915,1720 5994,1799 ; 5915,1820 5994,1899 ; 5915.91,1999.33 5994.91,1920.33 ; 5915.91,2099.33 5994.91,2020.33 ; 5915.91,2199.33 5994.91,2120.33 ; 5915.91,2499.33 5994.91,2420.33 ; 5916.28,1699.05 5995.28,1620.05 ; 5916.28,1799.05 5995.28,1720.05 ; 5916.28,1899.05 5995.28,1820.05 ; 6325.03,212.25 6325.03,3007.28
  lines w6: 628,3772 628,4007 ; 652,3356 652,3591 ; 728,3772 728,4007 ; 752,3356 752,3591 ; 828,3772 828,4007 ; 852,3356 852,3591 ; 928,3772 928,4007 ; 952,3356 952,3591 ; 980,-786 1004,-859 ; 1028,3772 1028,4007 ; 1052,3356 1052,3591 ; 1109,-803 1109,-568 ; 1128,3772 1128,4007 ; 1152,3356 1152,3591 ; 1209,-803 1209,-568 ; 1228,3772 1228,4007 ; 1230,-437 1230,-202 ; 1252,3356 1252,3591 ; 1309,-803 1309,-568 ; 1328,3772 1328,4007 ; 1330,-437 1330,-202 ; 1352,3356 1352,3591 ; 1409,-803 1409,-568 ; 1428,3772 1428,4007 ; 1430,-437 1430,-202 ; 1452,3356 1452,3591 ; 1509,-803 1509,-568 ; 1528,3772 1528,4007 ; 1530,-437 1530,-202 ; 1552,3356 1552,3591 ; 1609,-803 1609,-568 ; 1628,3772 1628,4007 ; 1630,-437 1630,-202 ; 1652,3356 1652,3591 ; 1709,-803 1709,-568 ; 1728,3772 1728,4007 ; 1730,-437 1730,-202 ; 1752,3356 1752,3591 ; 1809,-803 1809,-568 ; 1828,3772 1828,4007 ; 1830,-437 1830,-202 ; 1852,3356 1852,3591 ; 1909,-803 1909,-568 ; 1928,3772 1928,4007 ; 1930,-437 1930,-202 ; 1952,3356 1952,3591 ; 2009,-803 2009,-568 ; 2028,3772 2028,4007 ; 2030,-437 2030,-202 ; 2052,3356 2052,3591 ; 2109,-803 2109,-568 ; 2128,3772 2128,4007 ; 2130,-437 2130,-202 ; 2152,3356 2152,3591 ; 2209,-803 2209,-568 ; 2228,3772 2228,4007 ; 2230,-437 2230,-202 ; 2252,3356 2252,3591 ; 2309,-803 2309,-568 ; 2328,3772 2328,4007 ; 2330,-437 2330,-202 ; 2352,3356 2352,3591 ; 2409,-803 2409,-568 ; 2428,3772 2428,4007 ; 2430,-437 2430,-202 ; 2452,3356 2452,3591 ; 2509,-803 2509,-568 ; 2528,3772 2528,4007 ; 2530,-437 2530,-202 ; 2552,3356 2552,3591 ; 2609,-803 2609,-568 ; 2628,3772 2628,4007 ; 2630,-437 2630,-202 ; 2652,3356 2652,3591 ; 2709,-803 2709,-568 ; 2728,3772 2728,4007 ; 2730,-437 2730,-202 ; 2752,3356 2752,3591 ; 2809,-803 2809,-568 ; 2828,3772 2828,4007 ; 2830,-437 2830,-202 ; 2852,3356 2852,3591 ; 2909,-803 2909,-568 ; 2930,-437 2930,-202
  lines w10: 4952,212 4952,3007 10458.78,3007 10458.78,212 4952,212
  text "GND" at 617,3926 h30 r90
  text "FET-0" at 966,3870 h30 r90
  text "TIMER7" at 919,3847 h30 r90
  text "Z_DIAG" at 1167,3843 h30 r90
  text "TIMER6" at 1019,3839 h30 r90
  text "HEAT-0" at 1366,3838 h30 r90
  text "LCD_DE" at 2016,3838 h30 r90
  text "GPIO2_1" at 1416,3823 h30 r90
  text "E0_DIAG" at 1266,3815 h30 r90
  text "GPIO1_14" at 1316,3794 h30 r90
  text "GPIO1_12" at 1116,3793 h30 r90
  text "GPIO1_29" at 1816,3787 h30 r90
  text "MMC1_CMD" at 1515,3784 h30 r90
  text "GPIO0_26" at 1216,3783 h30 r90
  text "BED-HEAT" at 1468,3780 h30 r90
  text "LCD_PCLK" at 1915,3777 h30 r90
  text "LCD_DAT7" at 2516,3775 h30 r90
  text "LCD_DATA1" at 2816,3765 h30 r90
  text "MMC1_DAT1" at 1716,3764 h30 r90
  text "MMC1_DAT3" at 816,3756 h30 r90
  text "MMC1_DAT7" at 716,3754 h30 r90
  text "LCD_DATA3" at 2716,3750 h30 r90
  text "MMC1_DAT5" at 1615,3749 h30 r90
  text "LCD_DATA9" at 2416,3748 h30 r90
  text "LCD_DATA5" at 2616,3748 h30 r90
  text "LCD_DATA11" at 2216,3731 h30 r90
  text "LCD_DATA10" at 2316,3726 h30 r90
  text "LCD_DATA15" at 2116,3724 h30 r90
  text "2" at 614,3720 h40
  text "10" at 997,3720 h40
  text "20" at 1493,3719 h40
  text "30" at 1994,3718 h40
  text "40" at 2492,3718 h40
  text "46" at 2791,3718 h40
  text "31" at 2127,3601 h40
  text "41" at 2622,3601 h40
  text "45" at 2815,3601 h40
  text "11" at 1130,3600 h40
  text "21" at 1626,3598 h40
  text "1" at 620,3596 h40
  text "FAN-2" at 990,3359 h30 r90
  text "MMC1_DAT2" at 840,3358 h30 r90
  text "MMC1_DAT6" at 740,3357 h30 r90
  text "FAN-3" at 1091,3357 h30 r90
  text "EHRPWM2B" at 1242,3357 h30 r90
  text "GND" at 641,3356 h30 r90
  text "Z-CS_DRV" at 1191,3356 h30 r90
  text "FAN-0" at 1291,3356 h30 r90
  text "GPIO1_15" at 1342,3356 h30 r90
  text "GPIO1_13" at 1143,3355 h30 r90
  text "MMC1_CLK" at 1640,3355 h30 r90
  text "MMC1_DAT0" at 1840,3355 h30 r90
  text "LCD_VSYNC" at 1940,3355 h30 r90
  text "LCD_DATA6" at 2540,3355 h30 r90
  text "LCD_DATA2" at 2739,3355 h30 r90
  text "TIMER4" at 944,3353 h30 r90
  text "E0-CS_DRV" at 1491,3353 h30 r90
  text "EHRPWM2A" at 1543,3353 h30 r90
  text "FAN-1" at 1590,3353 h30 r90
  text "MMC1_DAT4" at 1739,3353 h30 r90
  text "LCD_HSYNC" at 2040,3353 h30 r90
  text "LCD_DATA8" at 2439,3353 h30 r90
  text "GPIO0_27" at 1440,3352 h30 r90
  text "LCD_DATA13" at 2239,3352 h30 r90
  text "TIMER5" at 1041,3351 h30 r90
  text "LCD_DATA12" at 2340,3345 h30 r90
  text "LCD_DATA4" at 2639,3334 h30 r90
  text "LCD_DATA0" at 2839,3328 h30 r90
  text "LCD_DATA14" at 2139,3304 h30 r90
  text "Einsy" at 7477,3077 h50
  text "J21" at 5482,2404 h50
  text "J18" at 6025,2404 h50
  text "2" at 5199,2335 h50
  text "1" at 5478,2335 h50
  text "2" at 5762,2335 h50
  text "1" at 6029,2334 h50
  text "J17" at 6042,1704 h50
  text "2" at 5757,1640 h50
  text "1" at 6032,1636 h50
  text "1" at 6012,937 h50
  text "2" at 5757,936 h50
  text "J19" at 6057,927 h50
  text "J22" at 5467,322 h50
  text "2" at 5199,237 h50
  text "2" at 5755,237 h50
  text "1" at 5481,236 h50
  text "1" at 6031,236 h50
  text "J20" at 6012,142 h50
  text "31" at 2205,-191 h40
  text "41" at 2700,-191 h40
  text "45" at 2893,-191 h40
  text "11" at 1208,-192 h40
  text "1" at 692,-194 h40
  text "21" at 1704,-194 h40
  text "GND" at 742,-296 h30 r90
  text "3V3_SRC" at 843,-358 h30 r90
  text "PWR_BUT" at 1144,-361 h30 r90
  text "SRC(5V0)" at 1070,-391 h30 r90
  text "SYS_VOUT" at 1020,-398 h30 r90
  text "5V(PWR_IN)" at 947,-422 h30 r90
  text "EN_DRV" at 1470,-435 h30 r90
  text "X_DIAG" at 1271,-436 h30 r90
  text "I2C2_SCL" at 1621,-436 h30 r90
  text "UART4TXD" at 1321,-437 h30 r90
  text "SCL" at 1669,-437 h30 r90
  text "UART4RXD" at 1220,-438 h30 r90
  text "GPIO1_16" at 1419,-438 h30 r90
  text "UART2TXD" at 1721,-438 h30 r90
  text "MOSI" at 1769,-438 h30 r90
  text "I2C1_SCL" at 1520,-439 h30 r90
  text "SD_SS" at 1569,-439 h30 r90
  text "TACH_1" at 1871,-439 h30 r90
  text "Z-DIR" at 2070,-439 h30 r90
  text "SPI1_D0" at 2120,-439 h30 r90
  text "AIN4" at 2321,-439 h30 r90
  text "AIN6" at 2420,-439 h30 r90
  text "Z_THERM" at 2470,-439 h30 r90
  text "AIN0" at 2620,-439 h30 r90
  text "CLKOUT2" at 2720,-439 h30 r90
  text "GPIO1_17" at 1819,-440 h30 r90
  text "E0-DIR" at 1970,-440 h30 r90
  text "GPIO3_19" at 2020,-440 h30 r90
  text "X-DIR" at 2170,-440 h30 r90
  text "SPI1_SCLK" at 2219,-440 h30 r90
  text "X-STEP" at 2271,-440 h30 r90
  text "THERM0" at 2371,-440 h30 r90
  text "AIN2" at 2520,-440 h30 r90
  text "THERM1" at 2672,-440 h30 r90
  text "E0-STEP" at 2771,-440 h30 r90
  text "GND" at 2820,-440 h30 r90
  text "GND" at 2920,-440 h30 r90
  text "GPIO3_21" at 1920,-441 h30 r90
  text "THERM2" at 2571,-441 h30 r90
  text "GND" at 2799,-648 h30 r90
  text "GND" at 2899,-648 h30 r90
  text "SCK" at 1748,-650 h30 r90
  text "RX2" at 1947,-650 h30 r90
  text "TX2" at 1847,-651 h30 r90
  text "SDA" at 1648,-653 h30 r90
  text "AIN1" at 2598,-663 h30 r90
  text "AIN5" at 2399,-672 h30 r90
  text "MISO" at 1549,-673 h30 r90
  text "AIN3" at 2500,-675 h30 r90
  text "AGND" at 2299,-680 h30 r90
  text "Z_MIN" at 2448,-704 h30 r90
  text "Y-DIR" at 2048,-705 h30 r90
  text "TACH_0" at 1249,-736 h30 r90
  text "Y_DIAG" at 2549,-736 h30 r90
  text "Y-STEP" at 2149,-737 h30 r90
  text "Z-STEP" at 2749,-738 h30 r90
  text "SPI1_D1" at 2098,-749 h30 r90
  text "GPIO0_7" at 2696,-765 h30 r90
  text "GPIO1_28" at 1199,-783 h30 r90
  text "EHRPWM1A" at 1299,-788 h30 r90
  text "I2C1_SDA" at 1496,-788 h30 r90
  text "SPI1_CS0" at 1998,-789 h30 r90
  text "EHRPWM1B" at 1400,-790 h30 r90
  text "I2C2_SDA" at 1597,-792 h30 r90
  text "UART1TXD" at 1799,-793 h30 r90
  text "UART1RXD" at 1900,-793 h30 r90
  text "X-CS_DRV" at 1346,-796 h30 r90
  text "UART2RXD" at 1701,-799 h30 r90
  text "Y-CS_DRV" at 1449,-800 h30 r90
  text "GND" at 725,-802 h30 r90
  text "3V3_SRC" at 823,-853 h30 r90
  text "2" at 697,-854 h40
  text "10" at 1080,-854 h40
  text "20" at 1576,-855 h40
  text "5V(PWR_IN)" at 924,-856 h30 r90
  text "30" at 2077,-856 h40
  text "40" at 2575,-856 h40
  text "46" at 2874,-856 h40

## Dimensions
0,0 to 6325,0 on Drill Drawing
0,0 to 0,3228 on Drill Drawing